# Altium PCB Led Strip 2 colors HD.PcbDoc
Units mm, origin at the board's own origin, x right, y up, seen from the top; angles counter-clockwise.
Board outline 152.4 x 101.6 mm, 2 copper layers (Top Layer, Bottom Layer); 18 components, 20 nets, 45 pads, 0 vias.
Unrouted connection lines stored in the file: 8.
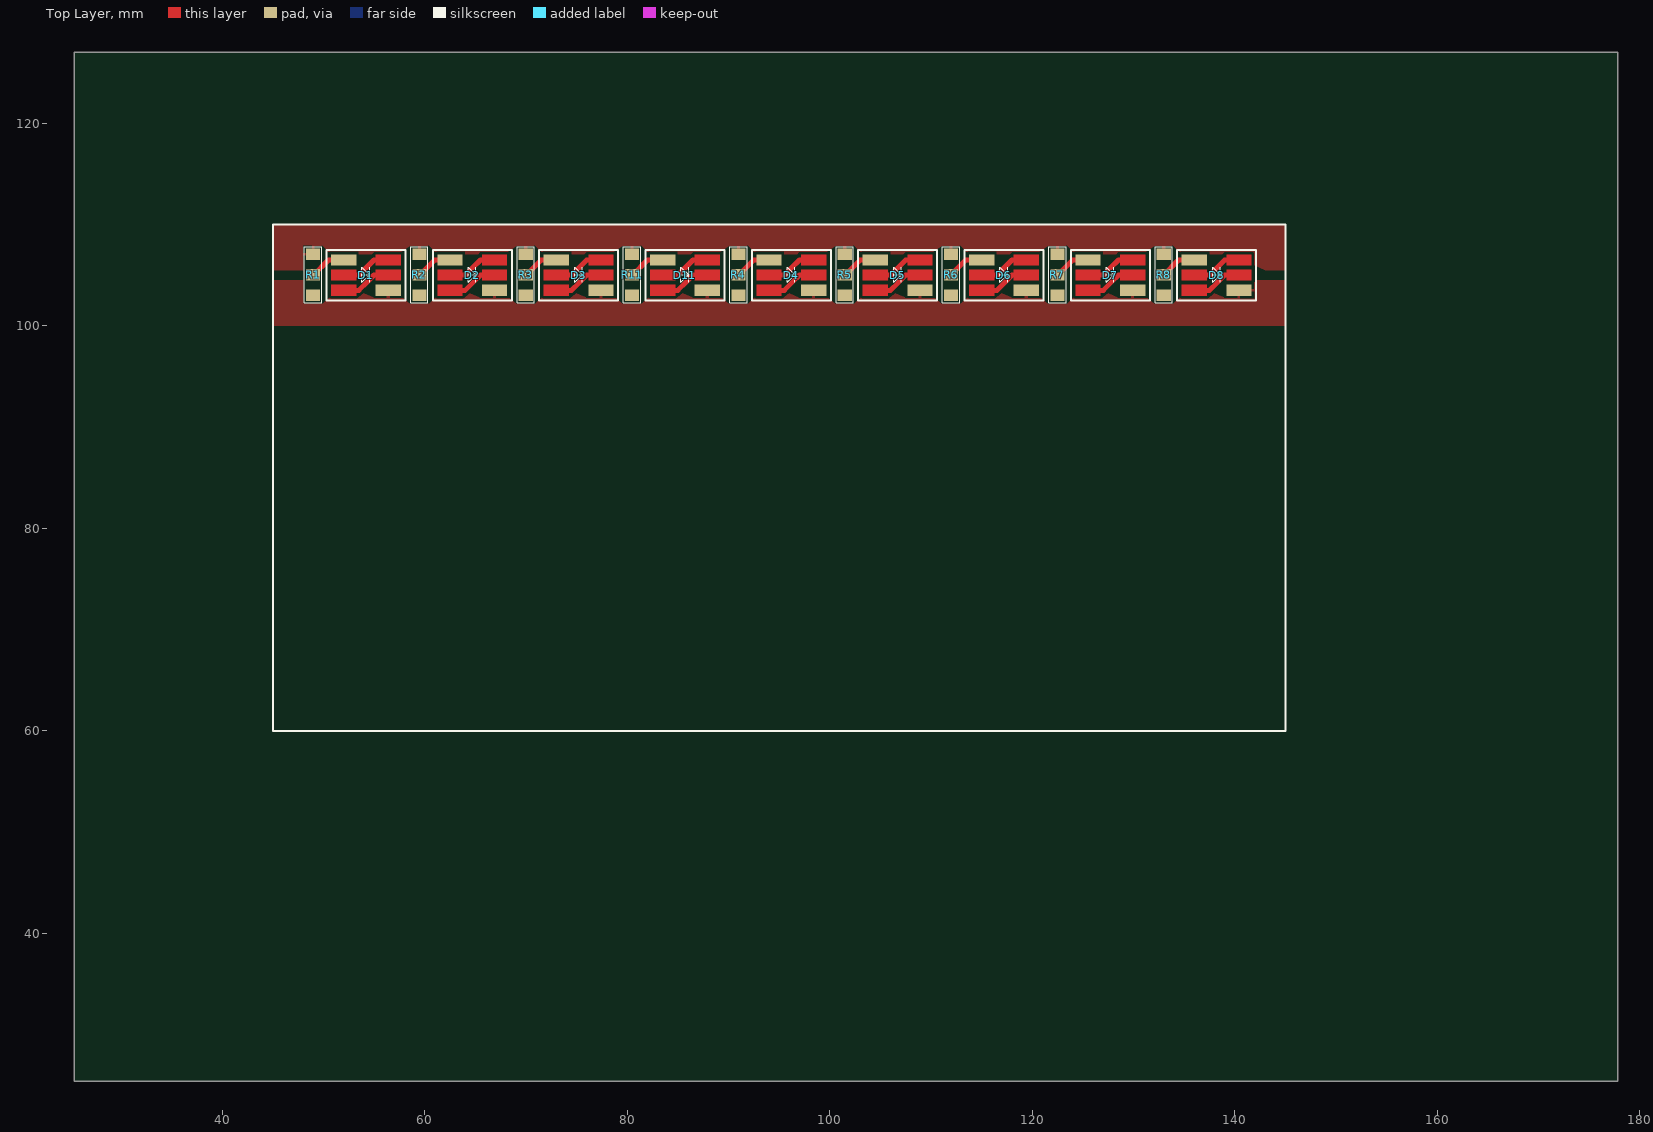
[diagram p0: Top Layer view]
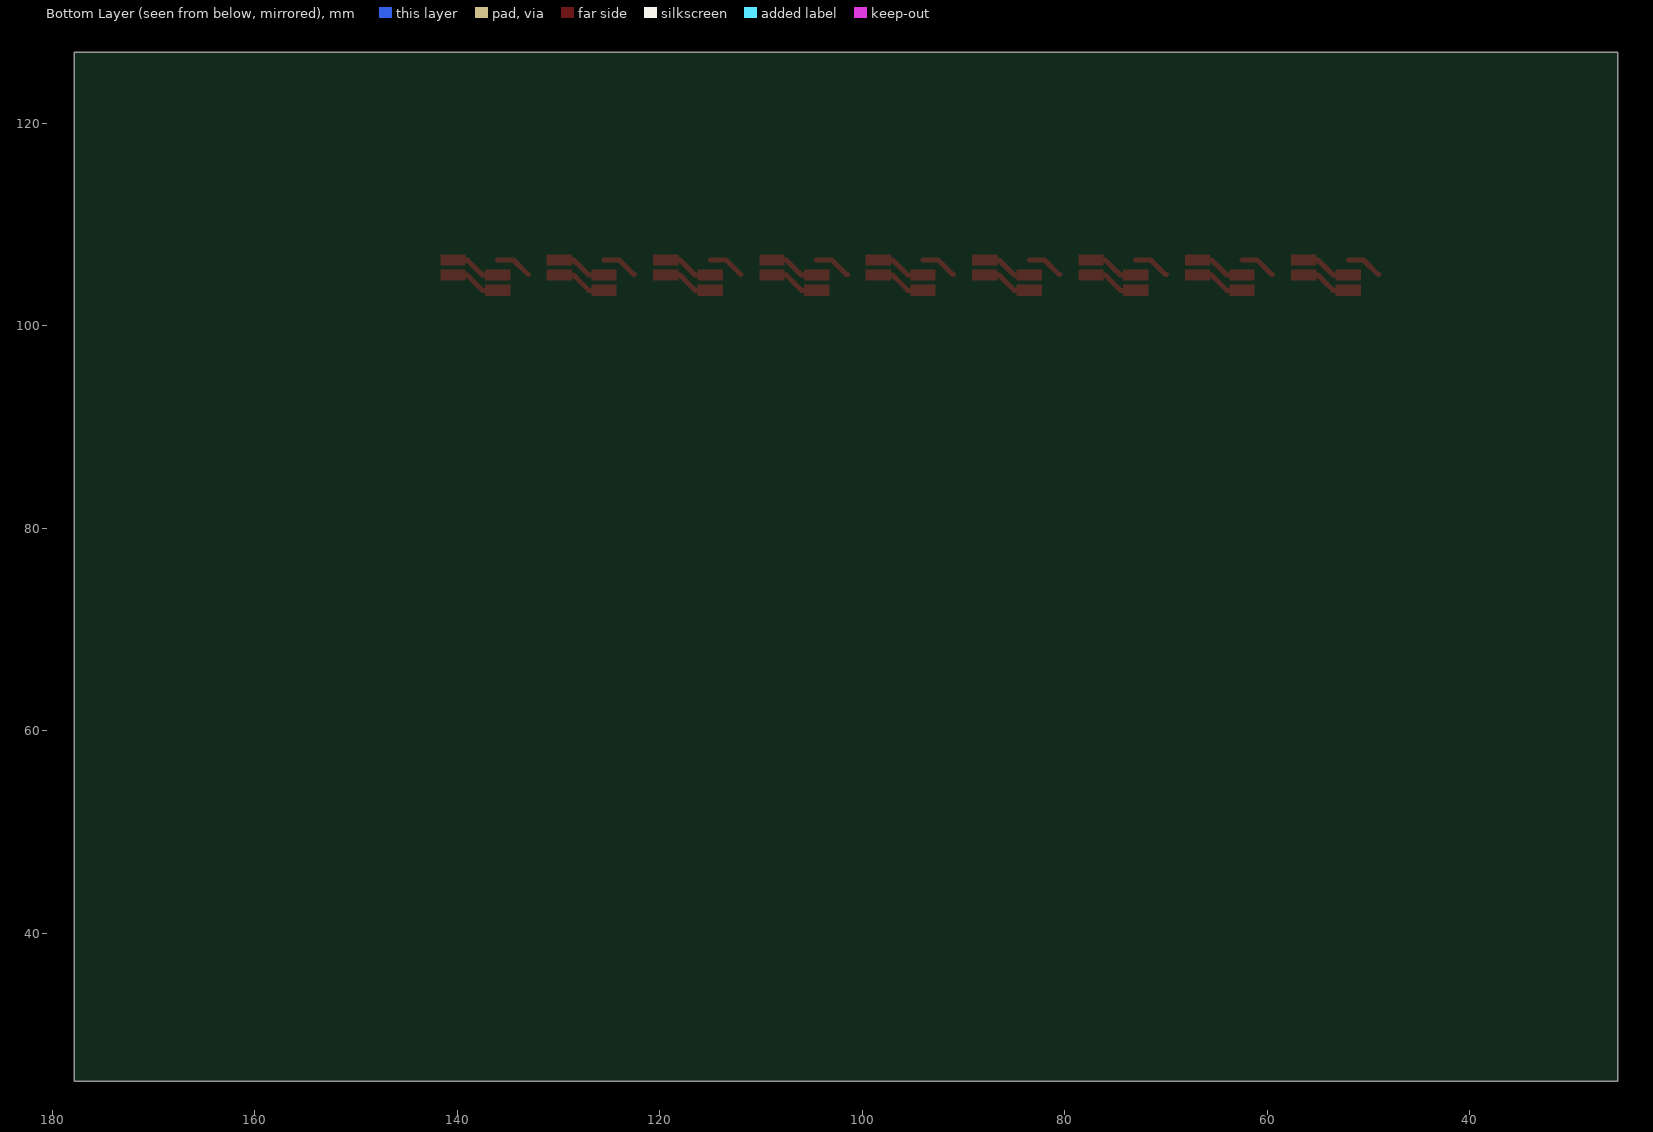
[diagram p1: Bottom Layer view, seen from below]

## Layer stack, top to bottom
Top Solder: solder mask 0.0102, Solder Resist, Dk 3.5
Top Layer: signal copper 0.0356
Dielectric 1: dielectric 0.32, FR-4, Dk 4.8
Bottom Layer: signal copper 0.0356
Bottom Solder: solder mask 0.0102, Solder Resist, Dk 3.5

## Board outline
25.4,25.4 177.8,25.4 177.8,127 25.4,127

## Design rules (kind name [scope] priority, off if disabled: settings)
Clearance [All] p1: gap=0.254
PolygonConnect [All] p1: connectstyle=Relief reliefconductorwidth=0.254 reliefentries=4 polygonreliefangle="90 Angle" airgapwidth=0.254
RoutingVias [All] p1: holewidth=0.711 width=1.27 viastyle="Through Hole" minholewidth=0.711 minwidth=1.27 maxholewidth=0.711 maxwidth=1.27
SolderMaskExpansion [All] p1: expansion=0.102
Width [All] p1: maxlimit=2.5 minlimit=0.2 preferedwidth=0.2
29 further rules are at their usual default settings.

## Components (designator, comment, footprint, x,y, rotation, side; value= is the part's Value field where it differs from the comment)
D1 "Cold White" "LED SMD 5050 White compact R" 52,106.5 r0 top
D2 "Cold White" "LED SMD 5050 White compact R" 62.5,106.5 r0 top
D3 "Cold White" "LED SMD 5050 White compact R" 73,106.5 r0 top
D4 "Cold White" "LED SMD 5050 White compact R" 94,106.5 r0 top
D5 "Cold White" "LED SMD 5050 White compact R" 104.5,106.5 r0 top
D6 "Cold White" "LED SMD 5050 White compact R" 115,106.5 r0 top
D7 "Cold White" "LED SMD 5050 White compact R" 125.5,106.5 r0 top
D8 "Cold White" "LED SMD 5050 White compact R" 136,106.5 r0 top
D11 "Cold White" "LED SMD 5050 White compact R" 83.5,106.5 r0 top
R1 "1: Om; 2: Om" "SMD 0805 (2012) Double" 49,103 r90 top
R2 "1: Om; 2: Om" "SMD 0805 (2012) Double" 59.5,103 r90 top
R3 "1: Om; 2: Om" "SMD 0805 (2012) Double" 70,103 r90 top
R4 "1: Om; 2: Om" "SMD 0805 (2012) Double" 91,103 r90 top
R5 "1: Om; 2: Om" "SMD 0805 (2012) Double" 101.5,103 r90 top
R6 "1: Om; 2: Om" "SMD 0805 (2012) Double" 112,103 r90 top
R7 "1: Om; 2: Om" "SMD 0805 (2012) Double" 122.5,103 r90 top
R8 "1: Om; 2: Om" "SMD 0805 (2012) Double" 133,103 r90 top
R11 "1: Om; 2: Om" "SMD 0805 (2012) Double" 80.5,103 r90 top

## Footprints (in the part's own frame and the unit in brackets; to place one, negate y for a bottom-side part, rotate by r counter-clockwise, add the part's x,y. Pads: shape width x height; smd on the part's side, far side on the other; paste and mask are expansions set on the pad)
"LED SMD 5050 White compact R" [mm]
  rect 2.5x1.1 smd: A(0,0) K(4.4,-3)
  Top Layer region: -1.25,-3.55 1.25,-3.55 1.25,-2.45 -1.25,-2.45
  Top Layer region: -1.25,-2.05 1.25,-2.05 1.25,-0.95 -1.25,-0.95
  Top Layer region: 3.15,-2.05 5.65,-2.05 5.65,-0.95 3.15,-0.95
  Top Layer region: 3.15,-0.55 5.65,-0.55 5.65,0.55 3.15,0.55
  Top Layer lines w0.5: 0,-3 1.5,-3 2.3,-2.2 3,-1.5 4.4,-1.5 ; 0,-1.5 1.5,-1.5 2.2,-0.8 3,0 4.4,0
  silkscreen extent -1.7,-4 6.1,1, body extent -0.45,-4 4.85,1, height 1.6
"SMD 0805 (2012) Double" [mil]
  rect 45x55 smd: 1(0.35,0.98) 2(160.35,0.98) 3(80.35,0.98)
  silkscreen extent -29,-32 189,34, body extent 1,-24 159,26, height 18

## Part data
D1 D2 D3 D4 D5 D6 D7 D8 D11: library part "Led SMD White Cold", "?3v ?20mA"
R1 R2 R3 R4 R5 R6 R7 R8 R11: library part "Res SMD (Select one way)", "Choice from two resistors"

## Nets (pads, with @x,y where several pads share a name; then routed paths per layer and width w, separated by ;. In a path a pad name is that pad's centre, name@x,y a point inside that pad or via, vN(x,y) a via of type N, cw(c..) or ccw(c..) an arc to the next point about the centre after c; other vN are vias at no path point)
GND: D1.K D2.K D3.K D4.K D5.K D6.K D7.K D8.K D11.K
NetD1_A: D1.A R1.3 | length 3.6
  Top Layer w0.5: R1.3 49.041,105.041 50.5,106.5 D1.A
NetD2_A: D2.A R2.3 | length 3.6
  Top Layer w0.5: R2.3 59.541,105.041 61,106.5 D2.A
NetD3_A: D3.A R3.3 | length 3.6
  Top Layer w0.5: R3.3 70.041,105.041 71.5,106.5 D3.A
NetD4_A: D4.A R4.3 | length 3.6
  Top Layer w0.5: R4.3 91.041,105.041 92.5,106.5 D4.A
NetD5_A: D5.A R5.3 | length 3.6
  Top Layer w0.5: R5.3 101.541,105.041 103,106.5 D5.A
NetD6_A: D6.A R6.3 | length 3.6
  Top Layer w0.5: R6.3 113.434,106.5 D6.A
NetD7_A: D7.A R7.3 | length 3.6
  Top Layer w0.5: R7.3 122.541,105.041 124,106.5 D7.A
NetD8_A: D8.A R8.3 | length 3.6
  Top Layer w0.5: R8.3 134.434,106.5 D8.A
NetD9_A: 
NetD10_A: 
NetD11_A: D11.A R11.3 | length 3.6
  Top Layer w0.5: R11.3 80.541,105.041 82,106.5 D11.A
NetD12_A: 
NetD13_A: 
NetD14_A: 
NetD15_A: 
NetD16_A: 
NetD17_A: 
VCC1: R1.2 R2.2 R3.2 R4.2 R5.2 R6.2 R7.2 R8.2 R11.2
VCC2: R1.1 R2.1 R3.1 R4.1 R5.1 R6.1 R7.1 R8.1 R11.1

## Polygon pours and split planes (outlines as drawn)
GND on Top Layer "Top Layer-No Net" (solid, pour order 4): 145,104.5 145,100 45,100 45,104.5
VCC1 on Top Layer "Top Layer-No Net" (solid, pour order 2): 145,105.5 145,110 45,110 45,105.5

## Silkscreen, mask and mechanical layers (free items; w line width, h text height)
Top Overlay:
  lines w0.2: 45,60 45,110 145,110 145,60 45,60